# Altium PCB PCB1.PcbDoc
Units mil, origin at the board's own origin, x right, y up, seen from the top; angles counter-clockwise.
Board outline 2125.53 x 1277.29 mil, 2 copper layers (Top Layer, Bottom Layer); 8 components, 6 nets, 22 pads, 0 vias.
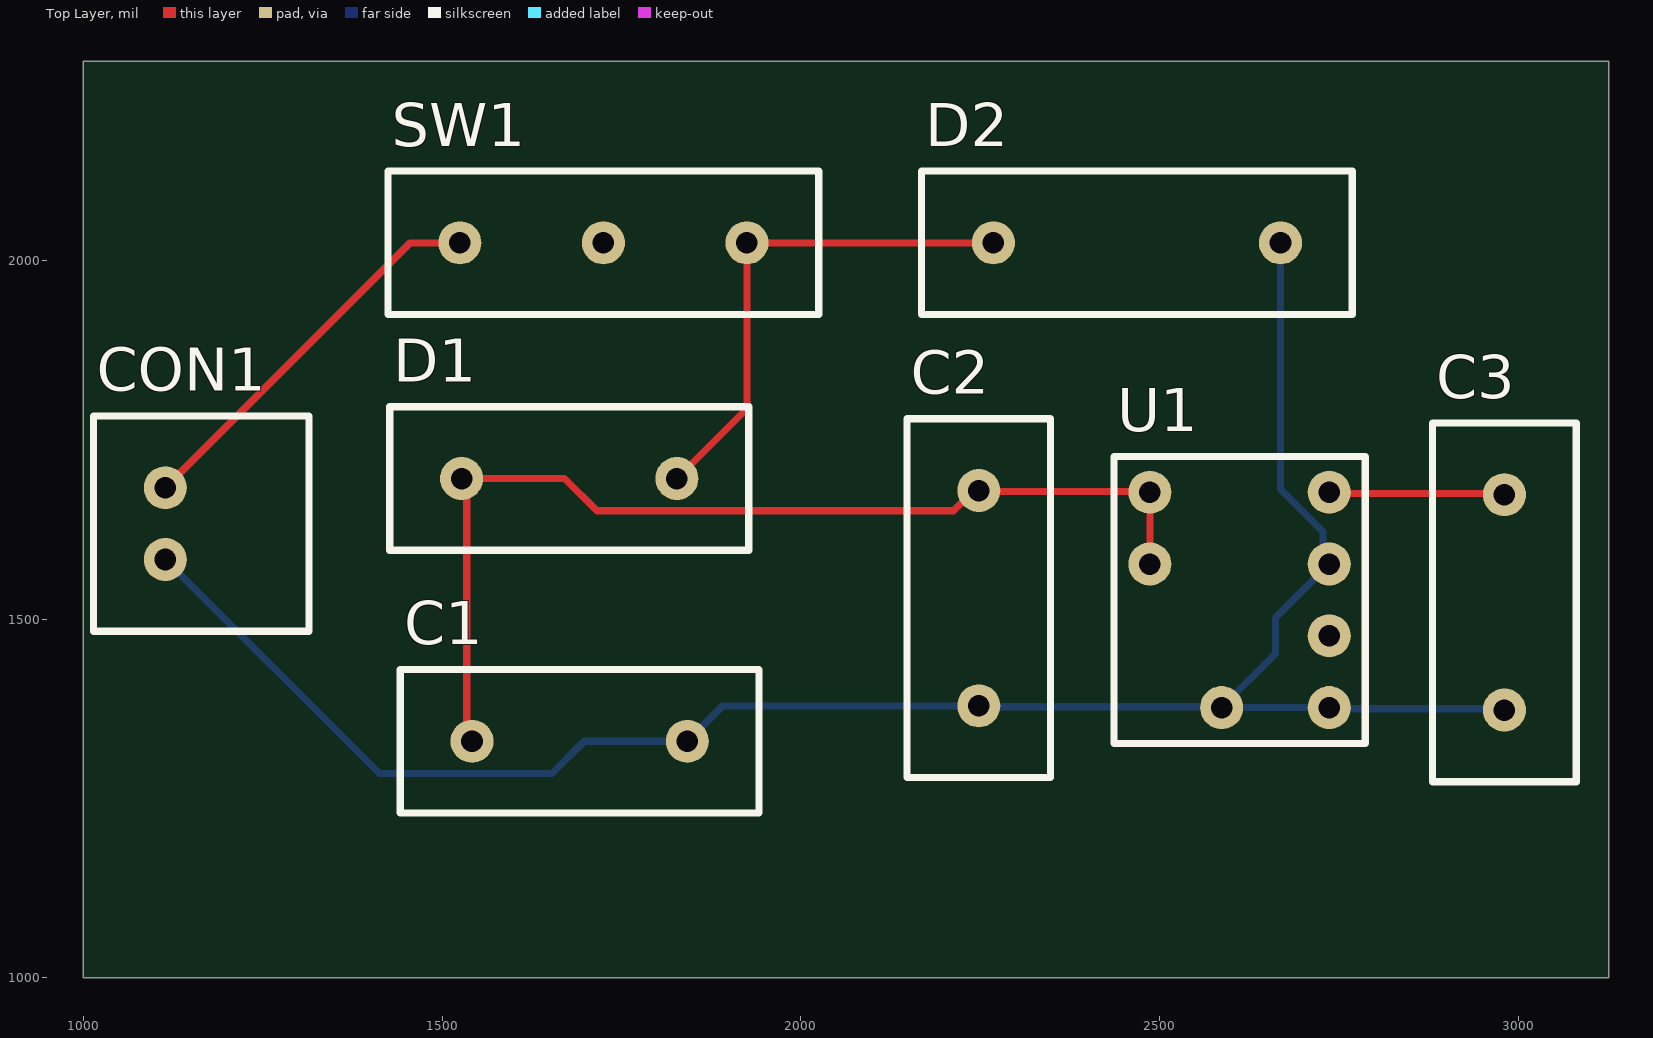
[diagram p0: Top Layer view]
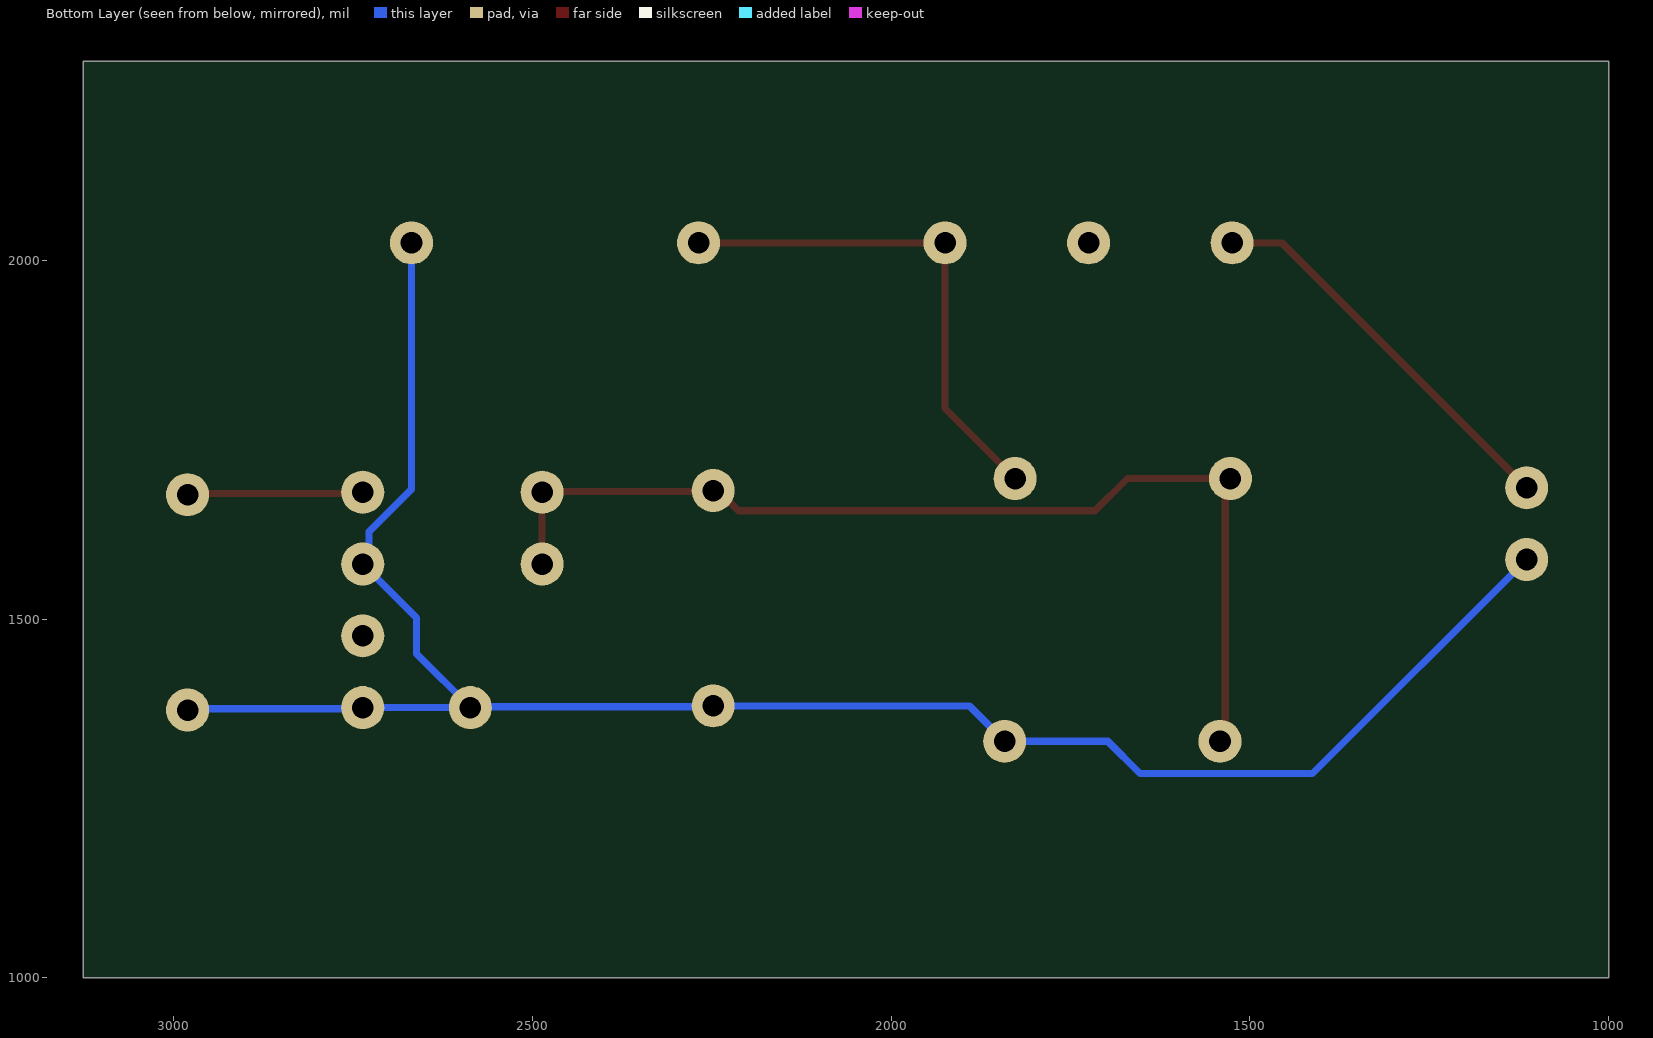
[diagram p1: Bottom Layer view, seen from below]

## Layer stack, top to bottom
Top Solder: solder mask 0.4, Solder Resist, Dk 3.5
Top Layer: signal copper 1.4
Dielectric 1: dielectric 12.6, FR-4, Dk 4.8
Bottom Layer: signal copper 1.4
Bottom Solder: solder mask 0.4, Solder Resist, Dk 3.5

## Board outline
1000,1000 3125.53,1000 3125.53,2277.29 1000,2277.29

## Design rules (kind name [scope] priority, off if disabled: settings)
Clearance [All] p1: gap=10 ignorepadtopadclearanceinfootprint=FALSE
PolygonConnect [All] p1: connectstyle=Relief reliefconductorwidth=10 reliefentries=4 polygonreliefangle="90 Angle" airgapwidth=10
RoutingVias [All] p1: holewidth=28 width=50 viastyle="Through Hole" minholewidth=28 minwidth=50 maxholewidth=28 maxwidth=50
SolderMaskExpansion [All] p1: expansion=4 istentingtop=FALSE
SupplyNets "Schematic Supply Nets" [InNet('GND')] p1: voltage=0.000
Width [All] p1: maxlimit=10 minlimit=10 preferedwidth=10
30 further rules are at their usual default settings.

## Components (designator, comment, footprint, x,y, rotation, side; value= is the part's Value field where it differs from the comment)
C1 "" "3.3F super cap" 2041.68,1529.74 r180 top
C2 "" "3.3F super cap" 2447.83,1179.14 r90 top
C3 "" "3.3F super cap" 3180.13,1173.33 r90 top
CON1 "BLM02B-XASS-TF" BM02B-XASS-TF 1014.36,1483.05 r0 top
D1 "PMEG4050EP,115" "PMEG4050 Schottky" 2027.15,1895.89 r180 top
D2 "ACPDZC12V0CHT" "ACPDZC TVS diode" 2068.17,1924.26 r0 top
SW1 "SW_SL-310" SW_SL-310 1324.76,1924.26 r0 top
U1 "TPS7A" TPS7A 2336.12,1376.75 r0 top

## Footprints (in the part's own frame and the unit in brackets; to place one, negate y for a bottom-side part, rotate by r counter-clockwise, add the part's x,y. Pads: shape width x height; smd on the part's side, far side on the other; paste and mask are expansions set on the pad)
"3.3F super cap" [mil]
  round 60 hole 30: 1(200,200) 2(500,200)
  silkscreen extent 100,100 600,300
"ACPDZC TVS diode" [mil]
  round 60 hole 30: 1(200,100) 2(600,100)
  silkscreen extent 100,0 700,200
BM02B-XASS-TF [mil]
  round 60 hole 30: 1(100,200) 2(100,100)
  silkscreen extent 0,0 300,300
"PMEG4050 Schottky" [mil]
  round 60 hole 30: 1(200,200) 2(500,200)
  silkscreen extent 100,100 600,300
SW_SL-310 [mil]
  round 60 hole 30: 1(200,100) 2(600,100) 3(400,100)
  silkscreen extent 100,0 700,200
TPS7A [mil]
  round 60 hole 30: 1(400,300) 2(400,200) 3(400,100) 4(150,200) 5(250,0) 6(150,300) 7(400,0)
  silkscreen extent 100,-50 450,350

## Part data
C1: library part "3.3F super cap"
C2 C3: library part Capacitor

## Nets (pads, with @x,y where several pads share a name; then routed paths per layer and width w, separated by ;. In a path a pad name is that pad's centre, name@x,y a point inside that pad or via, vN(x,y) a via of type N, cw(c..) or ccw(c..) an arc to the next point about the centre after c; other vN are vias at no path point)
8V: C1.2 C2.2 D1.2 U1.4 U1.6 | length 1462.5
  Top Layer w10: C1.2 1534.42,1337.01 1534.42,1688.63 D1.2 1670.74,1695.89 1715.74,1650.89 2212.44,1650.89 2240.69,1679.14 C2.2 2249.03,1677.94 2484.92,1677.94 U1.6 U1.4
GND: C1.1 C2.1 C3.1 CON1.2 D2.2 U1.2 U1.5 U1.7 | length 2766.9
  Top Layer w10: C2.1 C2.1@2249.03,1377.94 ; U1.2@2727.48,1585.39 U1.2 ; U1.7 U1.7@2737.83,1375.04 ; C3.1@2978.42,1375.04 C3.1
  Bottom Layer w10: CON1.2 1412.67,1284.74 1653.1,1284.74 1698.1,1329.74 C1.1 1891.08,1379.14 C2.1 ; C2.1@2249.03,1377.94 U1.5@2584.92,1377.94 ; D2.2 2668.17,1681.05 2727.48,1621.75 U1.2@2727.48,1585.39 ; U1.7 U1.5 2661.12,1451.75 2661.12,1501.75 U1.2 ; U1.7@2737.83,1375.04 C3.1@2978.42,1375.04
NetC3_2: C3.2 U1.1 | length 245.4
  Top Layer w10: U1.1 2737.83,1675.04 2978.42,1675.04 C3.2
NetCON1_1: CON1.1 SW1.1 | length 551.7
  Top Layer w10: CON1.1 1455.58,2024.26 SW1.1
NetD1_1: D1.1 D2.1 SW1.2 | length 712.2
  Top Layer w10: D1.1 1924.76,1793.5 SW1.2 D2.1
NetR1_1: U1.3
pads on no net: SW1.3